# Altium PCB PCB1.PcbDoc
Units mm, origin at the board's own origin, x right, y up, seen from the top; angles counter-clockwise.
Board outline 99.19 x 98.42 mm, 2 copper layers (Top Layer, Bottom Layer), stack 1.1 mm thick; 41 components, 37 nets, 133 pads, 17 vias.
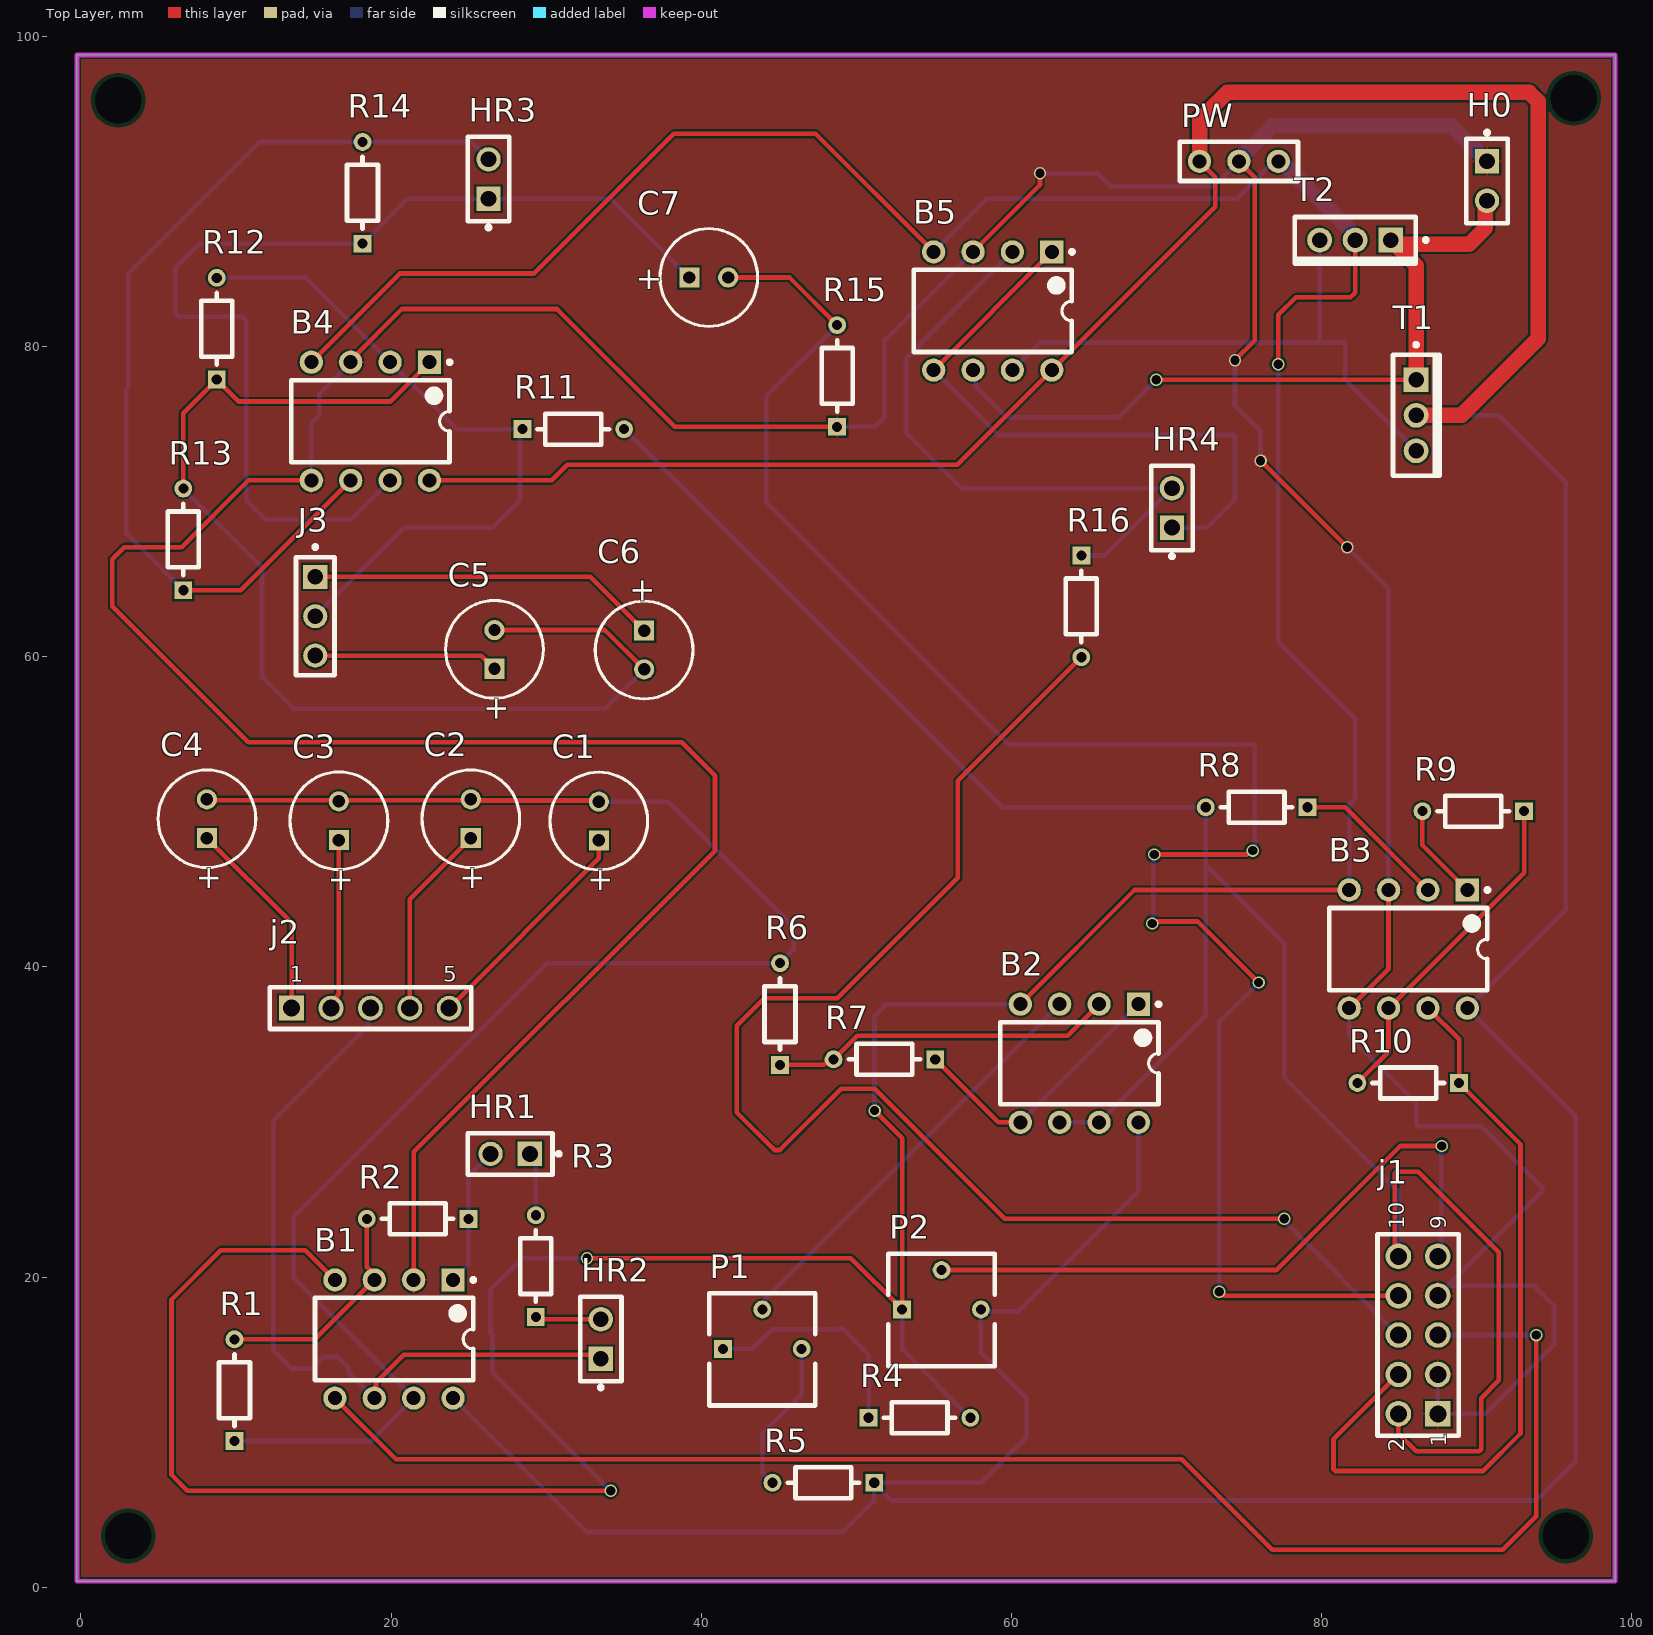
[diagram p0: Top Layer view]
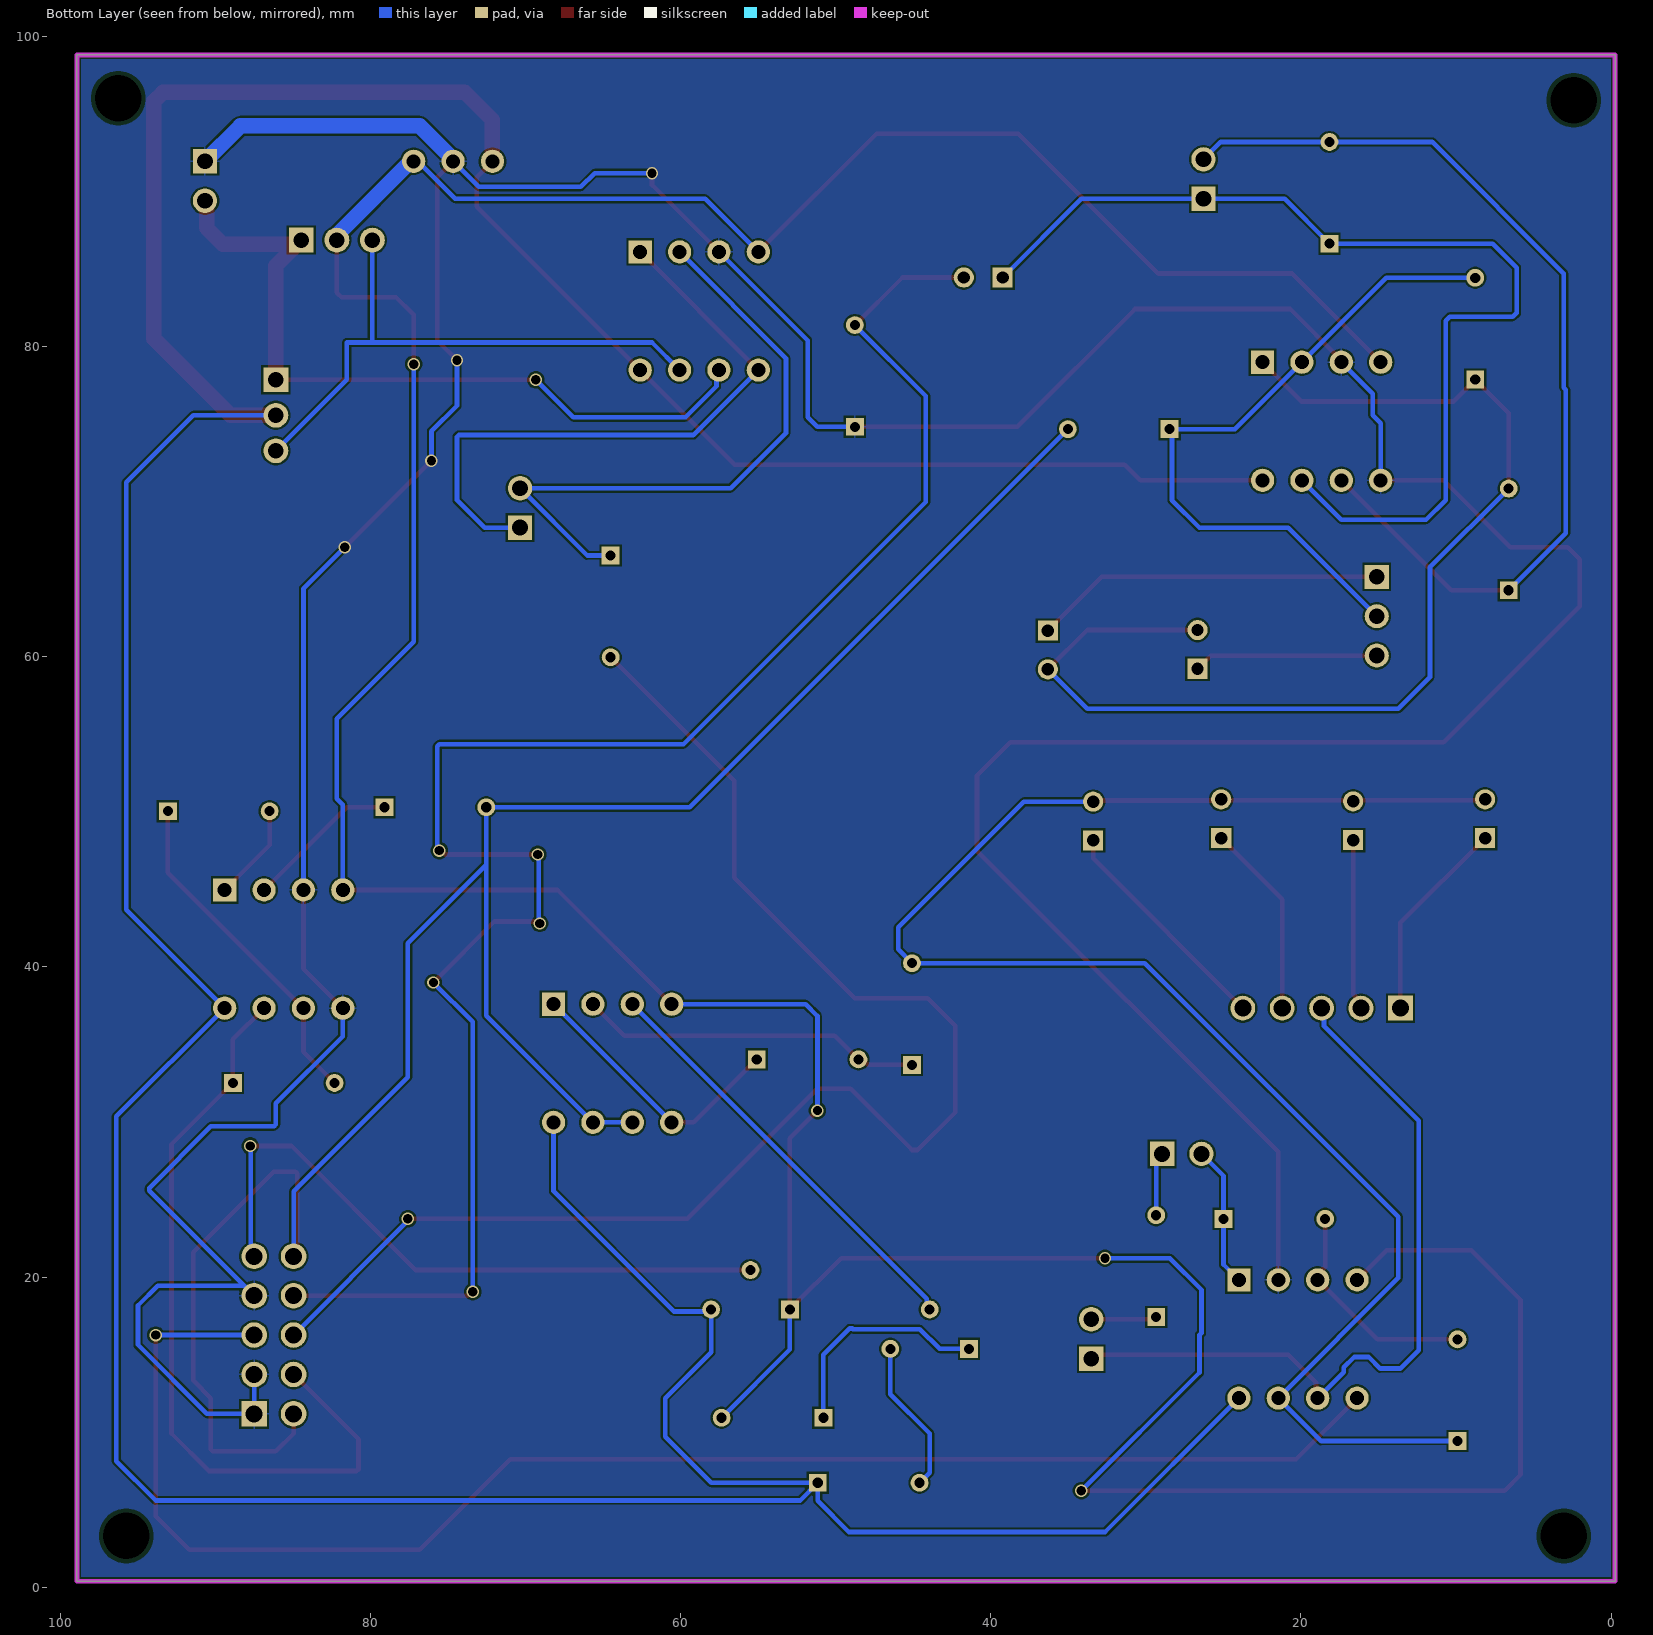
[diagram p1: Bottom Layer view, seen from below]
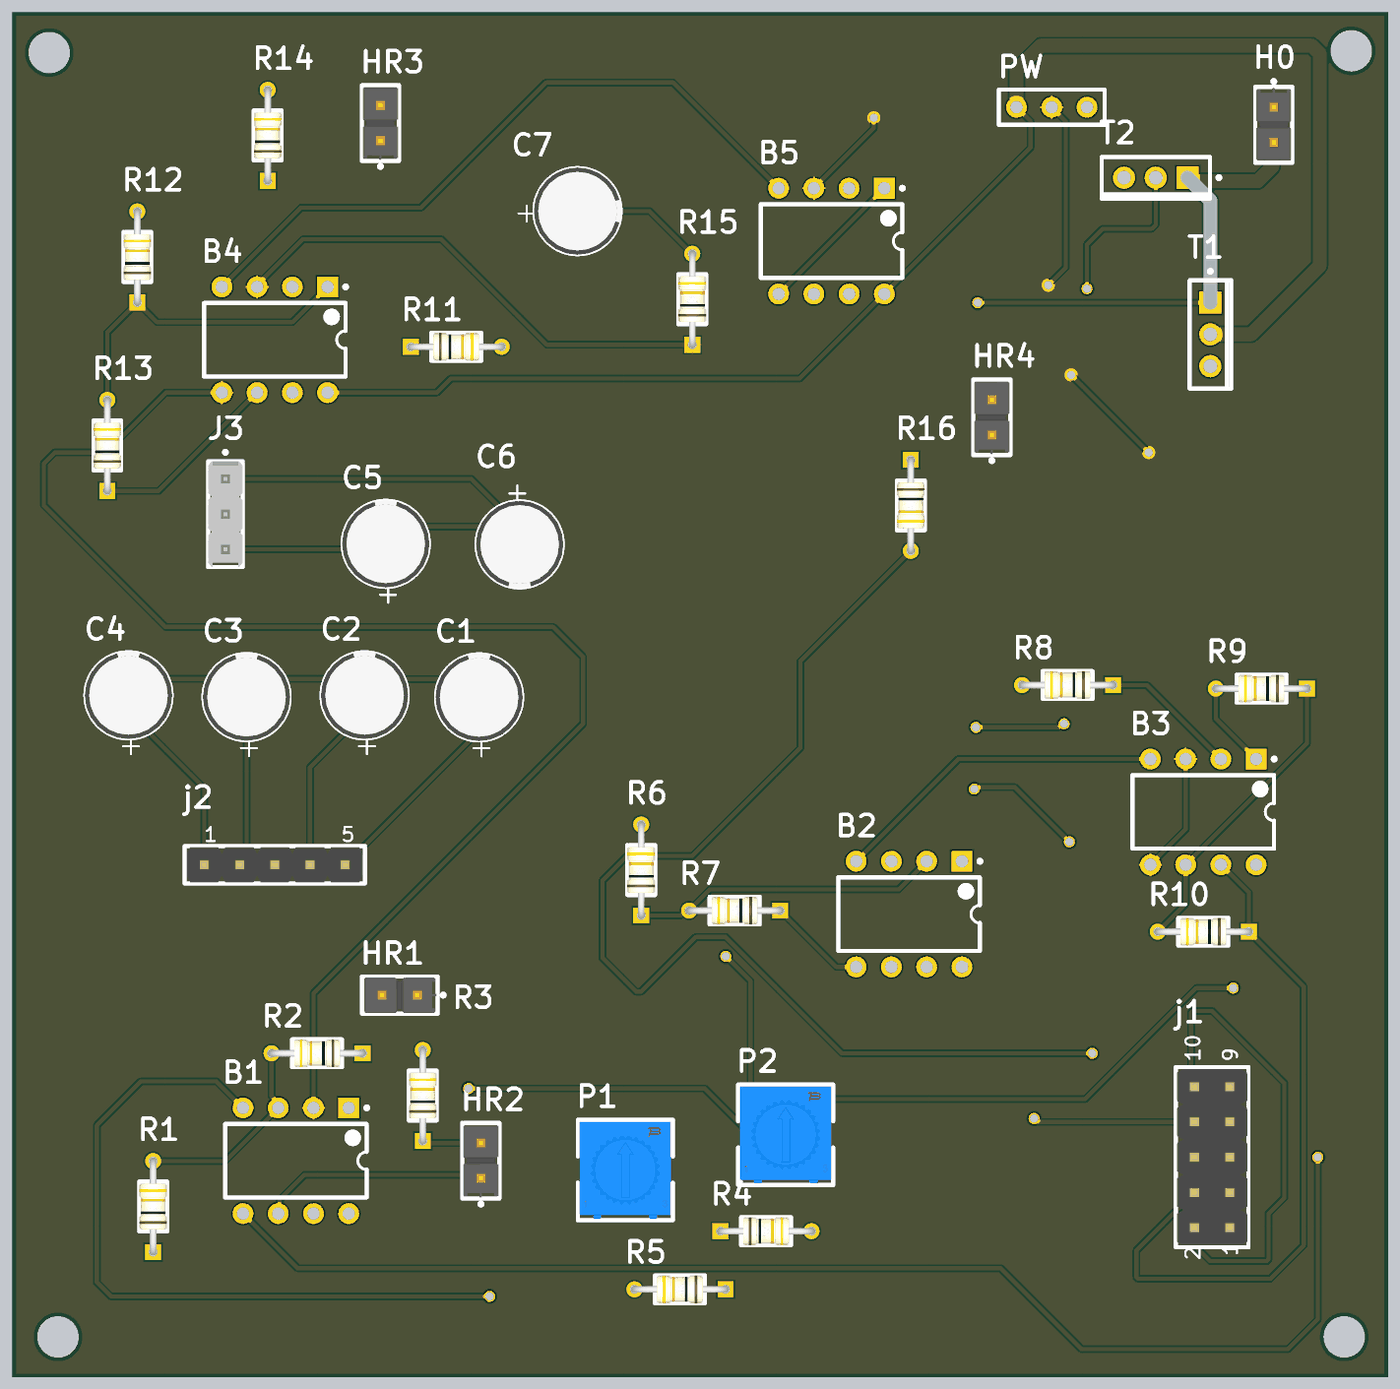
[diagram p2: 3D render of the assembled board from above, using the file's embedded part models]

## Layer stack, top to bottom
Top Solder: solder mask 0.05, Solder Resist, Dk 3.5
Top Layer: signal copper 0.1
Dielectric 1: dielectric 0.9, FR-4, Dk 4.8
Bottom Layer: signal copper 0.1
Bottom Solder: solder mask 0.05, Solder Resist, Dk 3.5

## Board outline
-0.254,0.381 98.933,0.381 98.933,98.806 -0.254,98.806

## Design rules (kind name [scope] priority, off if disabled: settings)
BoardOutlineClearance [All] p1: gap=0.2 ignorepadtopadclearanceinfootprint=FALSE
Clearance [All] p1: gap=0.127 ignorepadtopadclearanceinfootprint=FALSE except(0.25: Arc-Hole Track-Hole SMDPad-Hole THPad-Hole Via-Hole Fill-Hole Poly-Hole Region-Hole Text-Hole)
ComponentClearance [All] p1: gap=0.127 collisioncheckmode=3 verticalgap=0.127 showdistances=TRUE
DiffPairsRouting [All] p1: maxlimit=0.254 minlimit=0.127 mostfreqgap=0.127 toplayer_minwidth=0.127 toplayer_maxwidth=25.4 toplayer_prefwidth=0.127 bottomlayer_minwidth=0.127 bottomlayer_maxwidth=25.4 bottomlayer_prefwidth=0.127 maxuncoupledlength=12.7
Height [All] p1: minheight=0 maxheight=1816.048 prefheight=12.7
HoleSize [All] p1: absolutevalues=TRUE maxlimit=6.3 minlimit=0.3 maxpercent=80.000 minpercent=20.000
HoleToHoleClearance [All] p1: gap=0.25 allowstackedmicrovias=FALSE
MinimumAnnularRing [All] p1: minimumring=0.076
MinimumSolderMaskSliver [All] p1: minsoldermaskwidth=0
PlaneClearance [All] p1: clearance=0.127
PlaneConnect PlaneConnectPowerPads [InPadClass('PowerPads')] p1: planeconnectstyle=Direct reliefexpansion=0.508 reliefentries=4 reliefconductorwidth=0.254 reliefairgap=0.254
PlaneConnect [All] p2: pad.planeconnectstyle=Relief pad.reliefexpansion=0.3 pad.reliefentries=4 pad.reliefconductorwidth=0.127 pad.reliefairgap=0.127 via.planeconnectstyle=Direct via.reliefexpansion=0.3 via.reliefentries=4 via.reliefconductorwidth=0.127 via.reliefairgap=0.127
PolygonConnect PolygonConnectPowerPads [All vs (InPadClass('PowerPads'))] p1: connectstyle=Direct reliefconductorwidth=0.254 reliefentries=4 polygonreliefangle="90 Angle" airgapwidth=0.254
PolygonConnect [All] p2: thpad.connectstyle=Relief thpad.reliefconductorwidth=0.127 thpad.reliefentries=4 thpad.polygonreliefangle="90 Angle" thpad.airgapwidth=0.127 smdpad.connectstyle=Relief smdpad.reliefconductorwidth=0.127 smdpad.reliefentries=4 smdpad.polygonreliefangle="90 Angle" smdpad.airgapwidth=0.127 via.connectstyle=Direct via.reliefconductorwidth=0.127 via.reliefentries=4 via.polygonreliefangle="90 Angle" via.airgapwidth=0.127
RoutingVias [All] p1: holewidth=0.3 width=0.6 viastyle="Through Hole" minholewidth=0.3 minwidth=0.6 maxholewidth=0.6 maxwidth=6.6
SilkToSilkClearance [All] p1: silktosilkclearance=0
SilkToSolderMaskClearance [IsPad] p1: minsilkscreentomaskgap=0.127 clearancetoexposedcopper=TRUE
SolderMaskExpansion [All] p1: expansion=0.075 istentingtop=FALSE
Width [All] p1: maxlimit=25.4 minlimit=0.127 preferedwidth=0.127 minimp=50.000000 maximp=50.000000 favimp=50.000000
20 further rules are at their usual default settings.

## Classes and differential pairs
component class Sheet1: B1 B2 B3 B4 B5 C1 C2 C3 C4 C5 C6 C7 H0 j1 j2 J3 P1 P2 PW R1 R2 R3 R4 R5 R6 R7 R8 R9 R10 R11 R12 R13 R14 R15 R16 T1 T2

## Components (designator, comment, footprint, x,y, rotation, side; value= is the part's Value field where it differs from the comment)
B1 "smitch trigger" ADI-N-8 20.193,16.002 r270 top
B2 "comparator gain" ADI-N-8 64.389,33.782 r270 top
B3 "AD826ANZ" ADI-N-8 85.598,41.148 r270 top
B4 "AD826ANZ" ADI-N-8 18.669,75.184 r270 top
B5 "AD826ANZ" ADI-N-8 58.801,82.296 r270 top
C1 "1n" CAPPR55-250-1120X630X1220 33.401,49.403 r90 top
C2 "10n" CAPPR55-250-1120X630X1220 25.146,49.55 r90 top
C3 "100n" CAPPR55-250-1120X630X1220 16.637,49.423 r90 top
C4 "1u" CAPPR55-250-1120X630X1220 8.128,49.55 r90 top
C5 "100n" CAPPR55-250-1120X630X1220 26.67,60.472 r90 top
C6 "1u" CAPPR55-250-1120X630X1220 36.322,60.432 r270 top
C7 "10u" CAPPR55-250-1120X630X1220 40.493,84.455 r0 top
H0 "OUTPUT" FP-TSW-102-07-L-S-MFG 90.678,90.678 r270 top
HR1 "FREQ" FP-TSW-102-07-L-S-MFG 27.686,27.94 r180 top
HR2 "FREQ" FP-TSW-102-07-L-S-MFG 33.528,16.002 r90 top
HR3 "SINE AMP" FP-TSW-102-07-L-S-MFG 26.289,90.805 r90 top
HR4 "AMP" FP-TSW-102-07-L-S-MFG 70.358,69.596 r90 top
j1 "wave selector" 61301021121 86.233,16.256 r90 top
j2 "cap selector" 61300511121 18.669,37.338 r0 top
J3 "22-28-4033" MOLX-22-28-4033_V 15.113,62.611 r270 top
P1 "10k" FP-3362P-1-503TLF-MFG 43.942,15.332 r0 top
P2 "100k" FP-3362P-1-503TLF-MFG 55.499,17.872 r0 top
PW "Power" HDR1X3 72.136,91.948 r0 top
R1 "10k" FP-CF18-MFG 9.906,12.7 r90 top value=10kΩ
R2 "47k" FP-CF18-MFG 21.717,23.749 r180 top
R3 "330" FP-CF18-MFG 29.337,20.701 r90 top
R4 "47k" FP-CF18-MFG 54.08,10.922 r0 top value=10kΩ
R5 "47k" FP-CF18-MFG 47.879,6.731 r180 top value=10kΩ
R6 "10k" FP-CF18-MFG 45.085,36.957 r90 top value=10kΩ
R7 "10k" FP-CF18-MFG 51.816,34.036 r180 top value=10kΩ
R8 "10k" FP-CF18-MFG 75.819,50.292 r180 top value=10kΩ
R9 "10k" FP-CF18-MFG 89.789,50.038 r180 top value=10kΩ
R10 "2.7k" FP-CF18-MFG 85.598,32.512 r180 top
R11 "2.2k" FP-CF18-MFG 31.75,74.676 r0 top value=10kΩ
R12 "4.7k" FP-CF18-MFG 8.763,81.153 r90 top value=10kΩ
R13 "1k" FP-CF18-MFG 6.604,67.564 r90 top value=10kΩ
R14 "47k" FP-CF18-MFG 18.161,89.916 r90 top value=10kΩ
R15 "100k" FP-CF18-MFG 48.768,78.105 r90 top value=10kΩ
R16 "10k" FP-CF18-MFG 64.516,63.246 r270 top value=10kΩ
T1 "BD139" ONSC-TO-225-3-77-09 86.106,75.569 r0 top
T2 "BD140" ONSC-TO-225-3-77-09 82.173,86.868 r270 top

## Footprints (in the part's own frame and the unit in brackets; to place one, negate y for a bottom-side part, rotate by r counter-clockwise, add the part's x,y. Pads: shape width x height; smd on the part's side, far side on the other; paste and mask are expansions set on the pad)
61300511121 [mm] "Pin Header, pitch 2.54 mm, THT, Vertical, single row, 5p"
  rect 1.6x1.6 hole 1.1: 1(-5.08,0)
  round 1.6 hole 1.1: 2(-2.54,0) 3(0,0) 4(2.54,0) 5(5.08,0)
  silkscreen extent -6.5,-1.35 6.5,1.35, body extent -6.35,-1.27 6.35,1.27, height 8.57
61301021121 [mm] "Pin Header, pitch 2.54 mm, THT, Vertical, dual row, 10p"
  rect 1.65x1.65 hole 1.1: 1(-5.08,-1.27)
  round 1.65 hole 1.1: 2(-5.08,1.27) 3(-2.54,-1.27) 4(-2.54,1.27) 5(0,-1.27) 6(0,1.27) 7(2.54,-1.27) 8(2.54,1.27) 9(5.08,-1.27) 10(5.08,1.27)
  silkscreen extent -6.5,-2.62 6.5,2.62, body extent -6.35,-2.54 6.35,2.54, height 8.59
ADI-N-8 [mm] "DIP, 8-Leads, Body 9.59x6.6mm, Pitch 2.54mm"
  rect 1.5x1.5 hole 0.9: 1(-3.81,3.81)
  round 1.5 hole 0.9: 2(-3.81,1.27) 3(-3.81,-1.27) 4(-3.81,-3.81) 5(3.81,-3.81) 6(3.81,-1.27) 7(3.81,1.27) 8(3.81,3.81)
  silkscreen extent -3.93,-5.1 2.65,5.24, body extent -3.95,-5.07 3.95,5.07, height 5.33
CAPPR55-250-1120X630X1220 [mm] "THD, 2-Leads, Dia 6.3mm, Body Length 11.2mm"
  rect 1.3x1.3 hole 0.8: 1(-1.25,0)
  round 1.3 hole 0.8: 2(1.25,0)
  silkscreen extent -3.15,-3.15 3.15,3.15, body extent -3.15,-3.15 3.16,3.15, height 12.21
FP-3362P-1-503TLF-MFG [mm]
  rect 1.15x1.15 hole 0.65 paste-1000 mask+0: 1(-2.54,0.035)
  round 1.15 hole 0.65 paste-1000 mask+0: 2(0,2.575) 3(2.54,0.035)
  silkscreen extent -3.42,-3.62 3.42,3.62, body extent -3.52,-3.72 3.52,3.72, height 0.25
FP-CF18-MFG [mm]
  rect 1.15x1.15 hole 0.65 paste-1000 mask+0: 1(-3.28,0)
  round 1.15 hole 0.65 paste-1000 mask+0: 2(3.28,0)
  silkscreen extent -2.3,-1 2.3,1, body extent -3.96,-1.1 3.96,1.1, height 0.25
FP-TSW-102-07-L-S-MFG [mm]
  rect 1.57x1.57 hole 1.02 paste-1000 mask+0: 1(-1.27,0)
  round 1.57 hole 1.02 paste-1000 mask+0: 2(1.27,0)
  silkscreen extent -3.25,-1.34 2.73,1.34, body extent -2.83,-1.44 2.83,1.44, height 0.25
HDR1X3 [mm] "Connector; Header; 3 Position"
  round 1.5 hole 0.9: 1(0,0) 2(2.54,0) 3(5.08,0)
  silkscreen extent -1.27,-1.27 6.35,1.27
MOLX-22-28-4033_V [mm] "THD, 3-Leads, Body 7.62x2.49mm, Pitch 2.54mm"
  rect 1.55x1.55 hole 1.02: 1(-2.54,0)
  round 1.55 hole 1.02: 2(0,0) 3(2.54,0)
  silkscreen extent -4.58,-1.24 3.81,1.24, body extent -3.81,-1.24 3.81,1.24, height 8.38
ONSC-TO-225-3-77-09 [mm] "FM, 3-Leads, Body 7.8x3mm, Pitch 2.29mm"
  rect 1.6x1.6 hole 1: 1(0,2.29)
  round 1.6 hole 1: 2(0,0) 3(0,-2.29)
  silkscreen extent -1.49,-3.9 1.51,4.67, body extent -1.49,-3.9 1.51,3.9, height 13.64

## Part data
B1 B2: library part CMP-0384-00249-1, "Double Channel Low Power Operational Amplifier, 50 MHz BW, 350 V/us SR, Industrial, 8-pin DIP (N-8), Tube", Amplifiers Per Package=2, Generic Part Number=AD826, Input Bias Current=3.3uA, Input Offset Voltage=500uV, Manufacturer="Analog Devices", PartNumber=AD826ANZ, Code_JEDEC=MS-001, ComponentLink1Description="Manufacturer URL", ComponentLink1URL=http://www.analog.com/en/index.html, ComponentLink2Description=Datasheet, ComponentLink2URL=http://www.analog.com/static/imported-files/data_sheets/AD826.pdf, ComponentLink3Description="Package Specification", ComponentLink3URL=http:/www.analog.com/static/imported-files/packages/PKG_PDF/PDIP(N)/N_8.pdf, DatasheetVersion="Rev. C", Iq/Amp=7.5mA, Mounting Technology="Through Hole", PackageDescription="8-Pin Plastic Dual In-Line Package, Row spacing 7.62 mm, Pitch 2.54 mm", PackageReference=N-8, PackageVersion=070606-A, Slew Rate=350V/us, Small Signal Bandwidth=50MHz, V Span Max=36V, V Span Min=5V
B3 B4 B5: library part CMP-0384-00249-1, "Double Channel Low Power Operational Amplifier, 50 MHz BW, 350 V/us SR, Industrial, 8-pin DIP (N-8), Tube", Amplifiers Per Package=2, Generic Part Number=AD826, Input Bias Current=3.3uA, Input Offset Voltage=500uV, Manufacturer="Analog Devices", Code_JEDEC=MS-001, ComponentLink1Description="Manufacturer URL", ComponentLink1URL=http://www.analog.com/en/index.html, ComponentLink2Description=Datasheet, ComponentLink2URL=http://www.analog.com/static/imported-files/data_sheets/AD826.pdf, ComponentLink3Description="Package Specification", ComponentLink3URL=http:/www.analog.com/static/imported-files/packages/PKG_PDF/PDIP(N)/N_8.pdf, DatasheetVersion="Rev. C", Iq/Amp=7.5mA, Mounting Technology="Through Hole", PackageDescription="8-Pin Plastic Dual In-Line Package, Row spacing 7.62 mm, Pitch 2.54 mm", PackageReference=N-8, PackageVersion=070606-A, PartNumber=AD826ANZ, Slew Rate=350V/us, Small Signal Bandwidth=50MHz, V Span Max=36V, V Span Min=5V
C1 C2 C3 C4 C5 C6 C7: library part CMP-1665-00015-4, "Aluminum Electrolytic Capacitor (Radial Lead Type), 100 uF, 35 V, -40 to 85 degC, 2-Pin THD, RoHS, Bulk", Manufacturer=Panasonic, Max Operating Temperature="85 degC", Min Operating Temperature="-40 degC", Package Quantity=200, Voltage Rating="35 V", ComponentLink1Description="Manufacturer URL", ComponentLink1URL=http://www.panasonic.com/, ComponentLink2Description=Datasheet, ComponentLink2URL=http://industrial.panasonic.com/cdbs/www-data/pdf/RDF0000/ABA0000C1047.pdf, DatasheetVersion=03/2016, Height="11.2 mm", Lead Pitch="2.5 mm", Length="11.2 mm", Mount="Through Hole", Mounting Technology="Through Hole", PackageDescription="2-Pin Through Hole Device, Dia 6.3 mm, Body Length 11.2 mm", PackageReference=Radial, Packaging=Bulk, Pins=2, REACH SVHC="No SVHC", RoHSCompliant=true
H0 HR1 HR2 HR3 HR4: library part CMP-02766-001428-1, "CONN HEADER VERT 2POS 2.54MM", Color=Black, Current rating=7.6A, Max Operating Temperature=125°C, Max Voltage Rating (AC)=550V, Min Operating Temperature=-55°C, Package Quantity=1, Connector Type="Male Pin", Contact material=Bronze, Contact Mating Length=0.23inch, Contact Plating=Gold, Contact Type="Male Pin", Depth=2.54mm, Gender=Male, Housing Color=Black, Housing material=Polyester, Lead Free="Lead Free", Length=5.08mm, Max Current Rating=7.6A, Mount="Through Hole", Number of Contacts=2, Number of Positions=2, Number of Rows=1, Orientation=Straight, Packaging=Bulk, Pitch=2.54mm, Radiation Hardening=No, REACH SVHC="No SVHC", RoHS Compliant=Yes, Series=TSW, Termination=Solder, Voltage Rating=550V, Width=2.54mm
j1: library part CMP-1502-01084-1, "THT Vertical Pin Header WR-PHD, Pitch 2.54 mm, Dual Row, 10 pins", Contact Resistance=20mOhm, Manufacturer="Wurth Elektronik", Operating temperature=-40to105degC, Package Reference=61301021121, Rated Current=3A, Withstanding Voltage=500VAC, Working Voltage=250VAC, Datasheet URL=https://katalog.we-online.de/em/datasheet/6130xx21121.pdf, Gender=Male, Manufacturer URL=http://www.we-online.de, Mounting Technology=THT, Orientation=Vertical, Packaging=Bag, Part Number=61301021121, Pin Number=10, Pitch=2.54mm, Publisher=WurthElektronik, Row Number=Dual
j2: library part CMP-1502-01068-1, "THT Vertical Pin Header WR-PHD, Pitch 2.54 mm, Single Row, 5 pins", Contact Resistance=20mOhm, Manufacturer="Wurth Elektronik", Operating temperature=-40to105degC, Package Reference=61300511121, Rated Current=3A, Withstanding Voltage=500VAC, Working Voltage=250VAC, Datasheet URL=https://katalog.we-online.de/em/datasheet/6130xx11121.pdf, Gender=Male, Manufacturer URL=http://www.we-online.de, Mounting Technology=THT, Orientation=Vertical, Packaging=Bag, Part Number=61300511121, Pin Number=5, Pitch=2.54mm, Publisher=WurthElektronik, Row Number=Single
J3: library part CMP-1676-00001-5, "Male Header, Pitch 2.54 mm, 1 x 3 Position, Height 8.38 mm, Tail Length 3.18 mm, RoHS, Bulk", Colour=Black, Current rating="4 A", Manufacturer=Molex, Max Operating Temperature="75 degC", Min Operating Temperature="0 degC", Package Quantity=1, Voltage Rating="250 V", ComponentLink1Description="Manufacturer URL", ComponentLink1URL=http://www.molex.com/, ComponentLink2Description=Datasheet, ComponentLink2URL=http://www.molex.com/pdm_docs/sd/022284033_sd.pdf, Contact Finish=Gold, Contact material=Brass, Contact Plating=Gold, DatasheetVersion="Rev. G, 01/2012", Height="8.38 mm", Lead Pitch="0.1 inch", Length="7.62 mm", Mount="Through Hole", Mounting Technology="Through Hole", PackageDescription="Male Header, Pitch 2.54 mm, 1 x 3 Position, Height 8.38 mm, Tail Length 3.18 mm", PackageReference=22-28-4033, Packaging=Bulk, Pins=3, REACH SVHC=Unknown, RoHSCompliant=true, Rows=1
P1 P2: library part CMP-07234-000028-1, "TRIMMER 50K OHM 0.5W PC PIN TOP", Max Operating Temperature=125°C, Max Power Dissipation=500mW, Min Operating Temperature=-55°C, Package Quantity=50, Resistance=50kR, Resistance Tolerance=10%, Resistor Type=Cermet, Temperature Coefficient=100ppm/°C, Voltage Rating (DC)=300V, Depth=7.04mm, Height=0.185inch, Lead Free="Lead Free", Length=6.6mm, Military Standard=Not, Mount="Through Hole", Number of Turns=1, Packaging=Rail/Tube, Power Rating=500mW, Radiation Hardening=No, REACH SVHC="No SVHC", RoHS Compliant=Yes, Series="Trimpot® 3362 - Sealed", Technology=CERMET, Termination=Pin, Tolerance=10%, Weight=0.02oz, Width=4.7mm
PW: library part "Header 3", "Header, 3-Pin", LatestRevisionDate=17-Jul-2002, LatestRevisionNote="Re-released for DXP Platform.", Publisher="Altium Limited"
R1 R4 R5 R6 R7 R8 R9 R11 R12 R13 R14 R15 R16: library part CMP-26528-000002-1, "RES 10K OHM 1/8W 5% CF AXIAL", Manufacturer="Stackpole Electronics", Manufacturer Part Number=CF18JT10K0, Package=CF18, Power Rating=0.125W, Resistance=10kΩ, Temperature="-55°C to +155°C", Temperature Coefficient=0-500ppm/°C, Temperature Range High=+155°C, Temperature Range Low=-55°C, Tolerance=5%, Voltage Rating=250V, Automotive=No, Category=Res, ComponentLink2Description=Datasheet, ComponentLink2URL=http://www.seielect.com/Catalog/SEI-CF_CFM.pdf, Composition="Carbon Film", Device Class L1="Passive Components", Device Class L2=Resistors, Device Class L3="Through-Hole Resistors", Digikey Description="RES 10K OHM 1/8W 5% CF AXIAL", Height=2mm, Ipc Land Pattern Name=RESAD656W65L360D200, Lead Free=Yes, Octopart=https://octopart.com/cf18jt10k0-stackpole+electronics-19205642, RoHS=TRUE, Series=CF
R2 R3 R10: library part CMP-26528-000002-1, "RES 10K OHM 1/8W 5% CF AXIAL", Manufacturer="Stackpole Electronics", Manufacturer Part Number=CF18JT10K0, Package=CF18, Power Rating=0.125W, Temperature="-55°C to +155°C", Temperature Coefficient=0-500ppm/°C, Temperature Range High=+155°C, Temperature Range Low=-55°C, Tolerance=5%, Voltage Rating=250V, Automotive=No, Category=Res, ComponentLink2Description=Datasheet, ComponentLink2URL=http://www.seielect.com/Catalog/SEI-CF_CFM.pdf, Composition="Carbon Film", Device Class L1="Passive Components", Device Class L2=Resistors, Device Class L3="Through-Hole Resistors", Digikey Description="RES 10K OHM 1/8W 5% CF AXIAL", Height=2mm, Ipc Land Pattern Name=RESAD656W65L360D200, Lead Free=Yes, Octopart=https://octopart.com/cf18jt10k0-stackpole+electronics-19205642, RoHS=TRUE, Series=CF
  R2: Resistance=47k
  R3: Resistance=330
  R10: Resistance=2.7k
T1: library part CMP-1048-01271-1, "Plastic Medium-Power Silicon NPN Transistor, 3-Pin TO-225, Bulk Box", Manufacturer="On Semiconductor", ComponentLink1Description="Manufacturer URL", ComponentLink1URL=http://www.onsemi.com/, ComponentLink2Description=Datasheet, ComponentLink2URL=http://www.onsemi.com/pub_link/Collateral/BD135-D.PDF, ComponentLink3Description="Package Specification", ComponentLink3URL=http://www.onsemi.com/pub_link/Collateral/77-09.PDF, DatasheetVersion="Rev. 16", IC Continuous (A)=1.5, Mounting Technology="Through Hole", PackageDescription="3-Pin Flange Mount, Vertical Straight Lead, Body 7.6 x 2.7 mm, Pitch 2.29 mm", PackageReference=TO-225-3-77-09, PackageVersion="Rev. AC, 12/2013", Packing="Bulk Box", PartNumber=BD139, Polarity=NPN, RoHS=FALSE
T2: library part CMP-1048-00039-1, "Plastic Medium-Power Silicon PNP Transistor, 3-Pin TO-225, Bulk Box", Manufacturer="On Semiconductor", ComponentLink1Description="Manufacturer URL", ComponentLink1URL=http://www.onsemi.com/, ComponentLink2Description=Datasheet, ComponentLink2URL=http://www.onsemi.com/pub_link/Collateral/BD136-D.PDF, ComponentLink3Description="Package Specification", ComponentLink3URL=http://www.onsemi.com/pub_link/Collateral/77-09.PDF, DatasheetVersion="Rev. 15", IC Continuous (A)=1.5, Mounting Technology="Through Hole", PackageDescription="3-Pin Flange Mount, Vertical Straight Lead, Body 7.6 x 2.7 mm, Pitch 2.29 mm", PackageReference=TO-225-3-77-09, PackageVersion="Rev. AC, 12/2013", Packing="Bulk Box", PartNumber=BD140, Polarity=PNP, RoHS=FALSE

## Free pads (board coordinates)
  round 1 hole 3 unplated: 2(2.413,95.885) 3(96.266,96.012) 4(95.758,3.302) 5(3.048,3.302)

## Via types
v1: diameter 0.8, hole 0.6, Top Layer to Bottom Layer, 17 vias

## Nets (pads, with @x,y where several pads share a name; then routed paths per layer and width w, separated by ;. In a path a pad name is that pad's centre, name@x,y a point inside that pad or via, vN(x,y) a via of type N, cw(c..) or ccw(c..) an arc to the next point about the centre after c; other vN are vias at no path point)
GND: B1.2 B3.3 B3.5 B4.3 B4.5 B5.3 H0.1 j1.1 j1.3 j1.7 PW.2 R15.1 | length 313.9
  Top Layer w0.3: B4.5 10.81,71.374 6.492,67.056 2.794,67.056 2.032,66.294 2.032,63.246 10.795,54.483 38.735,54.483 40.894,52.324 40.894,47.498 21.463,28.067 B1.2 ; B4.3 17.399,79.121 20.701,82.423 30.698,82.423 38.296,74.825 R15.1 ; B5.3 61.849,90.424 v1(61.849,91.186) ; v1(74.422,79.121) 75.692,80.391 75.692,90.932 PW.2 ; v1(76.073,72.644) v1(81.661,67.056) ; B3.5 84.328,39.878 B3.3
  Bottom Layer w0.3: B4.5 14.859,75.057 15.367,75.565 15.367,76.962 B4.3 ; R15.1 51.203,74.825 51.816,75.438 51.816,80.391 B5.3 ; v1(61.849,91.186) 65.548,91.186 66.437,90.297 73.025,90.297 PW.2 ; v1(74.422,79.121) 74.422,76.2 76.073,74.549 v1(76.073,72.644) ; v1(81.661,67.056) 84.328,64.389 B3.3 ; B3.5 81.788,35.511 86.106,31.193 86.106,29.835 86.223,29.718 90.297,29.718 94.278,25.737 94.278,25.571 88.138,19.431 ; j1.3 j1.1 90.551,11.176 94.996,15.621 94.996,18.161 93.726,19.431 88.138,19.431 ; j1.7 88.138,19.431 ; j1.7@87.552,18.845 88.138,19.431
  Bottom Layer w1: PW.2 74.676,92.083 76.827,94.234 88.392,94.234 H0.1
NetB1_1: B1.1 HR1.2 R2.1 | length 9.1
  Bottom Layer w0.3: B1.1 24.997,20.806 R2.1 24.997,26.521 HR1.2
NetB1_3: B1.3 R1.2 R2.2 | length 14.7
  Top Layer w0.3: R1.2 15.091,15.98 B1.3 18.923,20.164 18.437,20.65 R2.2
NetB1_4: B1.4 B2.4 B3.4 B4.4 B5.4 P2.1 PW.3 R4.2 T2.2 | length 289.6
  Top Layer w0.3: B4.4 20.574,84.709 29.21,84.709 38.227,93.726 47.371,93.726 B5.4 ; B1.4 14.478,21.717 9.017,21.717 5.842,18.542 5.842,7.239 6.858,6.223 v1(34.163,6.223) ; v1(32.639,21.209) 49.657,21.209 P2.1 52.959,28.956 v1(51.181,30.734) ; B2.4 67.945,44.958 B3.4 ; v1(77.216,78.867) 77.216,82.042 78.359,83.185 81.873,83.185 82.173,83.485 T2.2
  Bottom Layer w0.3: v1(32.639,21.209) 28.448,21.209 26.416,19.177 26.416,16.383 26.543,16.256 26.543,13.843 v1(34.163,6.223) ; v1(51.181,30.734) 51.181,36.83 51.943,37.592 B2.4 ; P2.1 52.959,15.323 R4.2 ; B5.4 58.42,89.535 74.549,89.535 76.962,91.948 PW.3 ; v1(77.216,78.867) 77.216,60.96 82.169,56.007 82.169,50.849 81.788,50.468 B3.4
  Bottom Layer w1: PW.3 77.351,91.948 77.601,91.698 77.657,91.698 82.058,87.297 82.058,86.983 T2.2
NetB1_5: B1.5 j1.5 | length 100.4
  Top Layer w0.3: B1.5 20.32,8.255 70.993,8.255 76.835,2.413 91.694,2.413 93.853,4.572 v1(93.853,16.256)
  Bottom Layer w0.3: j1.5 v1(93.853,16.256)
NetB1_6: B1.6 HR2.1 j2.3 | length 49.1
  Top Layer w0.3: B1.6@19.027,12.296 19.027,13.185 20.83,14.988 HR2.1@33.272,14.988
  Bottom Layer w0.3: j2.3 18.51,37.179 18.51,36.171 12.414,30.075 12.414,15.272 13.589,14.097 14.876,14.097 15.621,14.842 16.574,14.842 17.247,14.168 17.247,13.868 B1.6
NetB1_7: B1.7 C1.2 C2.2 C3.2 C4.2 R1.1 R6.2 | length 109.8
  Top Layer w0.3: C4.2 8.191,50.736 16.573,50.736 C3.2 16.7,50.736 25.082,50.736 C2.2 25.219,50.727 33.328,50.727 C1.2
  Bottom Layer w0.3: R1.1 18.691,9.42 B1.7 13.716,19.939 13.716,23.876 30.077,40.237 R6.2 45.974,41.126 45.974,42.545 37.866,50.653 C1.2
NetB1_8: B1.8 B2.8 B3.8 B4.8 B5.8 P2.3 PW.1 R5.1 T1.2 | length 310
  Top Layer w0.3: B4.8 30.353,71.374 31.369,72.39 56.515,72.39 B5.8 73.152,89.027 73.152,90.932 PW.1
  Top Layer w1: PW.1 72.136,94.615 73.914,96.393 93.394,96.393 93.98,95.807 93.98,80.518 89.031,75.569 T1.2
  Bottom Layer w0.3: B1.8 32.639,3.556 49.149,3.556 51.159,5.566 R5.1 ; B2.8 68.199,25.527 60.452,17.78 58.166,17.78 P2.3 58.039,15.156 61.004,12.19 61.004,9.696 58.039,6.731 R5.1 ; T1.2 91.436,75.569 95.758,71.247 95.758,43.688 B3.8 96.393,30.353 96.393,8.128 93.853,5.588 52.302,5.588 R5.1
NetB2_1: B2.1 B2.5 R7.1 | length 17.9
  Top Layer w0.3: R7.1 59.16,29.972 B2.5
  Bottom Layer w0.3: B2.5 B2.1
NetB2_2: B2.2 R6.1 R7.2 | length 22.2
  Top Layer w0.3: R6.1 47.92,33.677 48.279,34.036 R7.2 50.06,35.56 63.627,35.56 B2.2
NetB2_3: B2.3 P1.2 | length 27.6
  Bottom Layer w0.3: P1.2 44.124,18.089 44.124,18.597 B2.3
NetB2_6: B2.6 B2.7 j1.2 j1.10 R8.2 R11.2 | length 138.4
  Top Layer w0.3: j1.2 84.963,9.906 86.106,8.763 90.18,8.763 90.297,8.88 90.297,12.192 91.44,13.335 91.44,21.59 86.233,26.797 84.836,26.797 84.719,26.68 84.719,21.58 j1.10
  Bottom Layer w0.3: R11.2 59.414,50.292 R8.2 72.539,46.587 ; B2.6 B2.7 72.539,36.852 72.539,46.587 ; j1.10 84.963,25.527 77.597,32.893 77.597,41.529 72.539,46.587
NetB3_1: B3.1 R9.2 | length 6.3
  Top Layer w0.3: R9.2 86.509,47.857 B3.1
NetB3_2: B3.2 R8.1 | length 10
  Top Layer w0.3: R8.1 81.534,50.292 B3.2
NetB3_6: B3.6 R9.1 R10.2 | length 22
  Top Layer w0.3: R10.2 84.328,34.522 B3.6 93.069,46.079 R9.1
NetB3_7: B3.7 j1.4 R10.1 | length 50.9
  Top Layer w0.3: j1.4 80.772,9.525 80.772,7.61 80.889,7.493 90.424,7.493 92.837,9.906 92.837,28.553 R10.1 88.878,35.328 B3.7
NetB4_1: B4.1 C5.2 C6.2 R12.1 R13.2 | length 74.8
  Top Layer w0.3: R13.2 6.604,75.714 R12.1 10.182,76.454 19.939,76.454 B4.1 ; C5.2 33.782,61.722 C6.2
  Bottom Layer w0.3: R13.2 11.684,65.764 11.684,58.674 13.716,56.642 33.782,56.642 C6.2
NetB4_2: B4.2 J3.2 R11.1 R12.2 | length 44.7
  Bottom Layer w0.3: R12.2 14.5,84.433 B4.2 24.257,74.676 28.321,74.676 R11.1 28.321,74.527 28.321,70.104 26.543,68.326 20.828,68.326 J3.2
NetB4_6: B4.6 HR3.2 R13.1 R14.2 | length 63
  Top Layer w0.3: R13.1 10.309,64.284 B4.6
  Bottom Layer w0.3: R13.1 2.921,67.967 2.921,77.216 3.048,77.343 3.048,84.709 11.535,93.196 R14.2 25.168,93.196 HR3.2
NetB4_7: B4.7 C7.1 HR3.1 R14.1 | length 67.2
  Bottom Layer w0.3: B4.7 17.399,68.834 11.938,68.834 10.668,70.104 10.668,81.661 10.414,81.915 6.35,81.915 6.096,82.169 6.096,85.09 7.642,86.636 R14.1 21.06,89.535 HR3.1 34.163,89.535 C7.1
NetB5_1: B5.1 B5.5 HR4.1 | length 40.9
  Top Layer w0.3: B5.5 B5.1
  Bottom Layer w0.3: B5.5 59.182,74.295 74.305,74.295 74.422,74.178 74.422,70.104 72.644,68.326 HR4.1
NetB5_2: B5.2 HR4.2 R16.1 | length 40.8
  Bottom Layer w0.3: B5.2 53.213,79.248 53.213,74.422 56.769,70.866 HR4.2 66.018,66.526 R16.1
NetB5_6: B5.6 H0.2 T1.1 T2.1 | length 49.5
  Top Layer w0.3: v1(69.342,77.851) 86.098,77.851 T1.1
  Top Layer w1: T1.1 86.106,85.225 T2.1 84.717,86.614 89.535,86.614 90.569,87.648 90.569,89.299 H0.2
  Bottom Layer w0.3: B5.6 57.692,78.325 57.692,77.436 59.69,75.438 66.929,75.438 v1(69.342,77.851)
NetB5_7: B5.7 T1.3 T2.3 | length 37.7
  Bottom Layer w0.3: B5.7 61.849,80.264 79.883,80.264 ; T2.3 79.883,80.264 ; T1.3 81.53,77.855 81.53,80.264 79.883,80.264
NetC1_1: C1.1 j2.5 | length 14.8
  Top Layer w0.3: j2.5 33.401,46.99 C1.1
NetC2_1: C2.1 j2.4 | length 12.6
  Top Layer w0.3: j2.4 21.209,44.363 C2.1
NetC3_1: C3.1 j2.2 | length 11
  Top Layer w0.3: j2.2 16.129,37.717 16.637,38.225 C3.1
NetC4_1: C4.1 j2.1 | length 13.2
  Top Layer w0.3: C4.1 13.589,42.839 j2.1
NetC5_1: C5.1 J3.3 | length 11.9
  Top Layer w0.3: J3.3 25.821,60.071 C5.1
NetC6_1: C6.1 J3.1 | length 22.6
  Top Layer w0.3: J3.1 32.853,65.151 C6.1
NetC7_2: C7.2 j1.8 R15.2 | length 118.4
  Top Layer w0.3: C7.2 45.698,84.455 R15.2 ; v1(69.088,42.799) 69.088,42.809 69.205,42.926 72.009,42.926 v1(75.946,38.989) ; v1(69.215,47.244) 75.176,47.244 75.43,47.498 v1(75.565,47.498) ; v1(73.406,19.05) 73.487,19.05 73.741,18.796 j1.8
  Bottom Layer w0.3: R15.2 44.196,76.813 44.196,69.977 59.817,54.356 75.565,54.356 75.692,54.229 v1@75.692,47.615 ; v1(69.088,42.799) 69.151,42.862 69.151,47.18 v1(69.215,47.244) ; v1(73.406,19.05) 73.406,36.449 v1(75.946,38.989)
NetHR1_1: HR1.1 R3.2 | length 4.1
  Bottom Layer w0.3: HR1.1 29.337,27.559 R3.2
NetHR2_2: HR2.2 R3.1 | length 4.3
  Top Layer w0.3: R3.1 29.486,17.272 HR2.2
NetJ1_6: j1.6 R16.2 | length 93.3
  Top Layer w0.3: R16.2 56.556,52.006 56.556,45.751 48.778,37.973 44.069,37.973 42.291,36.195 42.291,30.607 44.704,28.194 45.085,28.194 49.022,32.131 51.181,32.131 59.563,23.749 v1(77.597,23.749)
  Bottom Layer w0.3: v1(77.597,23.749) 77.597,23.622 j1.6
NetJ1_9: j1.9 P2.2 | length 42.8
  Top Layer w0.3: P2.2 77.089,20.447 85.09,28.448 v1(87.757,28.448)
  Bottom Layer w0.3: j1.9 87.719,21.552 87.719,28.41 v1(87.757,28.448)
NetP1_1: P1.1 R4.1 | length 14.7
  Bottom Layer w0.3: P1.1 43.307,15.367 44.577,16.637 48.895,16.637 48.939,16.681 49.105,16.681 50.8,14.986 R4.1
NetP1_3: P1.3 R5.2 | length 10
  Bottom Layer w0.3: R5.2 43.942,7.388 43.942,9.906 46.482,12.446 P1.3

## Polygon pours and split planes (outlines as drawn)
GND on Top Layer "GND_L01_P000" (solid, pour order 0): -0.127,98.933 0,98.806 98.806,98.806 98.806,0.254 98.552,0.508 -0.254,0.508
GND on Bottom Layer "GND_L02_P002" (solid, pour order 2): -0.508,98.552 -0.127,98.933 99.187,98.933 99.187,0.254 -0.127,0.254

## Keep-outs
Keep-Out Layer:
  the board outline again, w0.3

## Text inside footprints (layer, text, board x,y; h text height)
C1: Top Overlay "+" at 34.151,44.703 h1.5 r90
C2: Top Overlay "+" at 25.896,44.85 h1.5 r90
C3: Top Overlay "+" at 17.387,44.723 h1.5 r90
C4: Top Overlay "+" at 8.878,44.85 h1.5 r90
C5: Top Overlay "+" at 27.42,55.772 h1.5 r90
C6: Top Overlay "+" at 35.572,65.132 h1.5 r270
C7: Top Overlay "+" at 35.793,83.705 h1.5
j1: Top Overlay "10" at 85.333,23.066 h1.02 r90; Top Overlay "9" at 88.033,23.066 h1.02 r90; Top Overlay "1" at 88.033,9.046 h1.02 r90; Top Overlay "2" at 85.333,8.746 h1.02 r90
j2: Top Overlay "5" at 23.369,39.038 h1.02; Top Overlay "1" at 13.469,39.038 h1.02